# Altium PCB PCB_draft_00.PcbDoc (part 2 of 2)
Units mil, origin at the board's own origin, x right, y up, seen from the top; angles counter-clockwise.
Board outline 3461 x 3199 mil, 2 copper layers (Top Layer, Bottom Layer); 133 components, 93 nets, 389 pads, 200 vias.
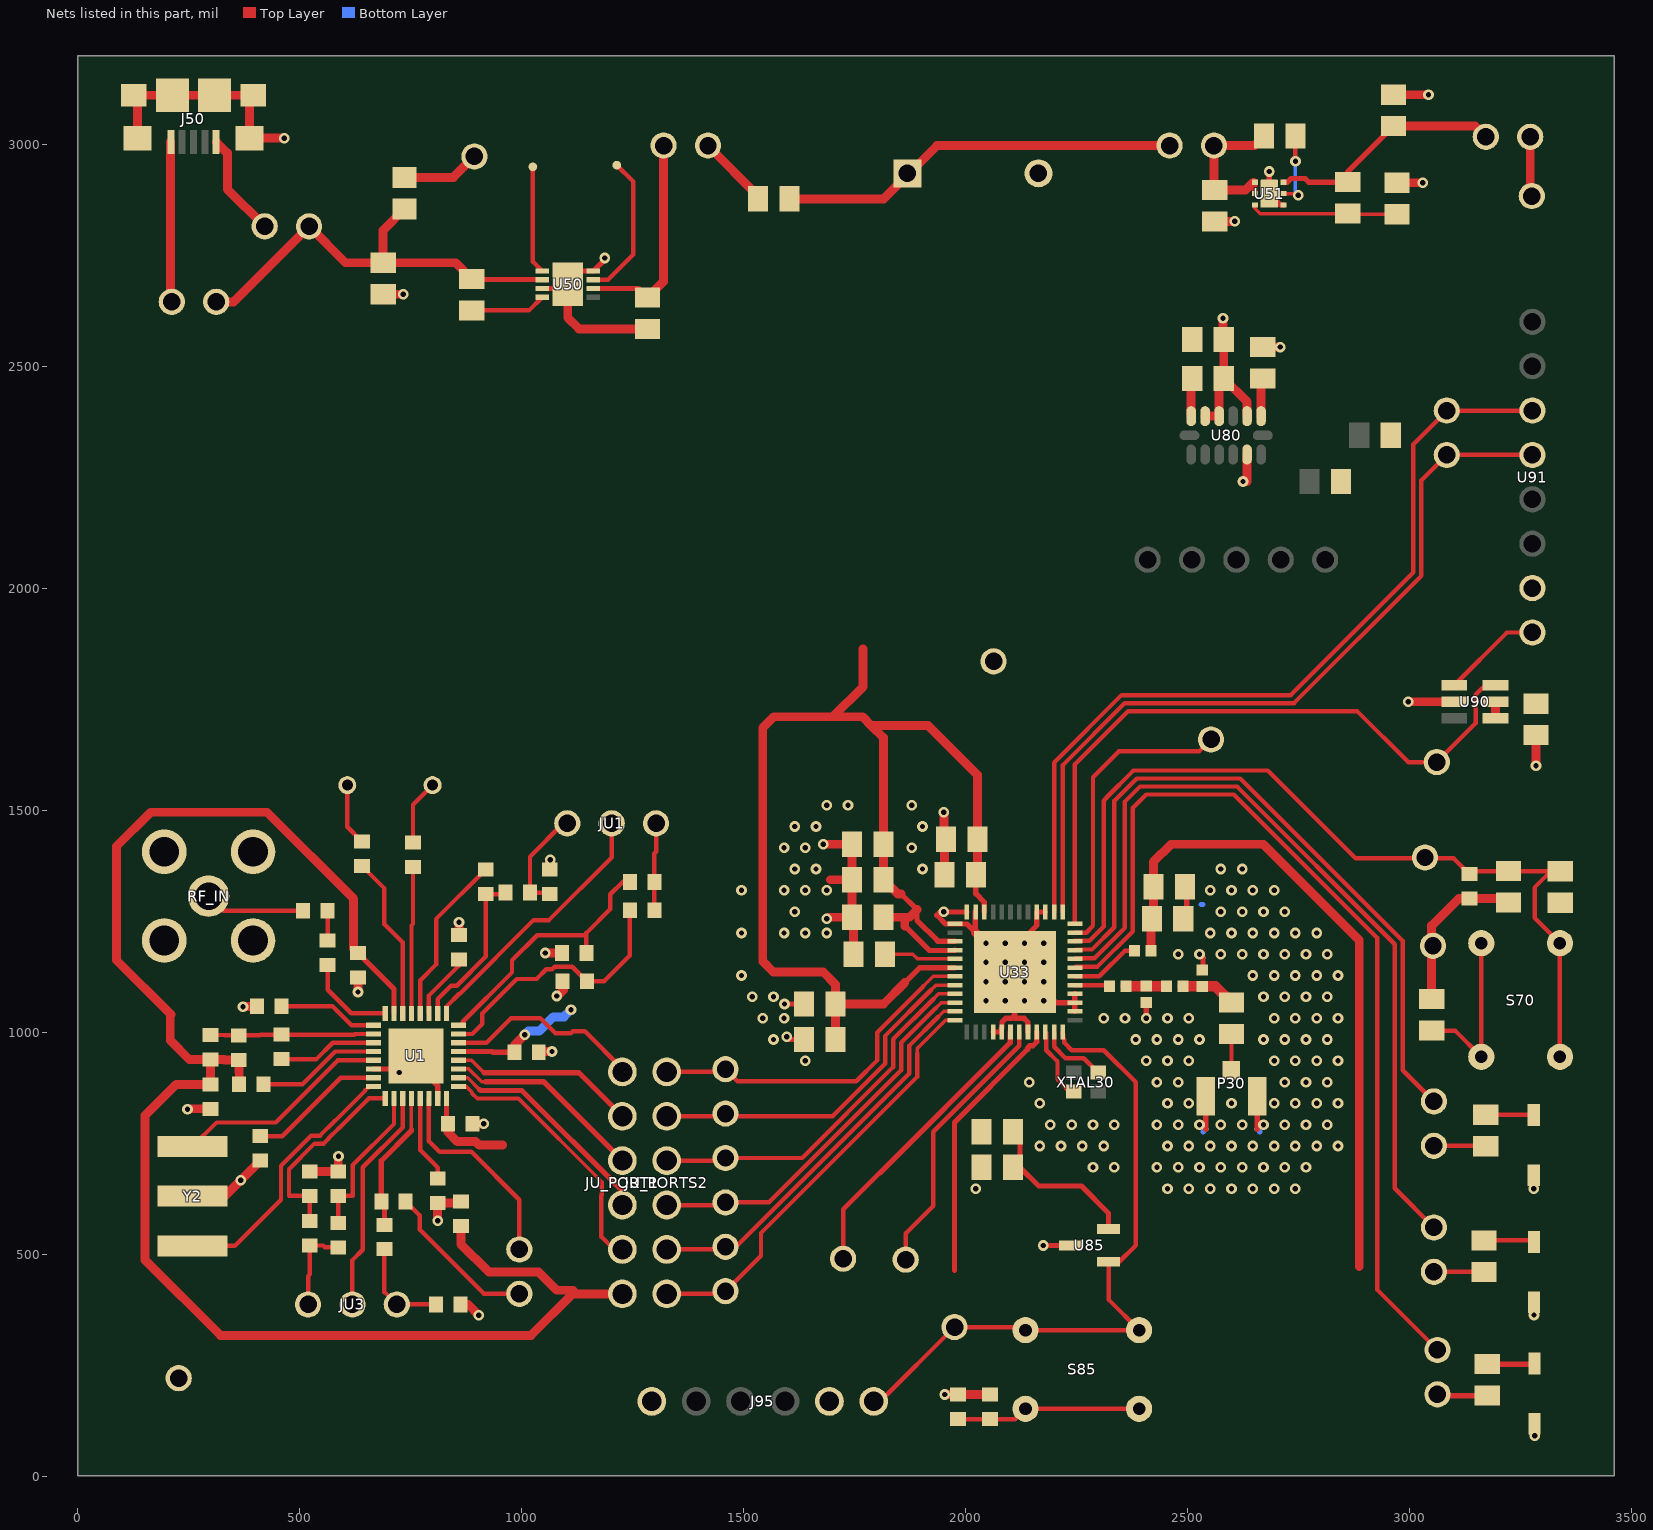
[diagram p2: the nets of this part, all layers, seen from the top]

## Via types
v1: diameter 24, hole 12, Top Layer to Bottom Layer, 200 vias

## Nets (pads, with @x,y where several pads share a name; then routed paths per layer and width w, separated by ;. In a path a pad name is that pad's centre, name@x,y a point inside that pad or via, vN(x,y) a via of type N, cw(c..) or ccw(c..) an arc to the next point about the centre after c; other vN are vias at no path point) (continued)
GND: C1.1 C2.1 C3.2 C5.1 C6.2 C10.1 C12.1 C19.1 C20.1 C21.1 C23.1 C26.1 C27.1 C29.1 C31.1 C32.1 C33.2 C34.2 C35.1 C36.1 C37.1 C38.1 C39.1 C40.1 C41.1 C42.1 C43.1 C44.1 C50.2 C51.1 C52.1 C53.1 C54.1 C70.1 C80.2 C81.1 C82.1 C90.2 D70.2 D71.2 D72.2 J50.5 J50.S1 J50.S2 J50.S3 J50.S4 J50.S5 J50.S6 J95.1 L3.1 P30.2 P30.3 R52.1 R70.1 R85.1 RF_IN.1 RF_IN.2 RF_IN.3 RF_IN.4 S50.2 TP10.1 TP14.1 TP20.1 TP50.1 U1.14 U1.23 U1.33 U33.0 U33.4 U33.5 U33.8 U33.14 U33.15 U33.16 U33.27 U33.28 U33.35 U33.36 U33.37 U50.3 U50.8 U50.9 U51.4 U51.7 U80.2 U80.4 U80.5 U80.12 U85.3 U90.2 U91.7 V50.2 Y2.2 Z70.2 Z85.2 | length 5982.5
  Top Layer w12: U1.14@665.48,917.61 U1.33@731.82,917.61 ; U1.33@761.35,929.09 810.56,879.87 U1.23@810.56,851.27 ; U50.3@1046.07,2676.16 U50.9@1093.72,2676.16 ; U50.9@1103.57,2686 1133.09,2715.53 U50.8@1161.07,2715.53 1187.09,2741.56 v1(1187.09,2744.74) ; v1(1592,1064) C44.1@1635.57,1064 ; v1(1597,990) 1603,984 C43.1@1635.57,984 ; U33.36@2002.73,1271.24 1942.24,1271.24 1935,1264 1954.73,1244.27 2002.73,1244.27 2021.85,1225.15 U33.35@2021.85,1271.8 ; v1(2046.04,1200.96) U33.0@2111,1136 ; U33.4@2061.79,1000.76 2080.59,1000.76 2080.59,1008.48 2082.04,1009.93 2082.04,1023.49 2090.24,1031.69 2103.8,1031.69 2111,1038.89 ; U33.8@2140.53,1000.76 2139.96,1001.33 2139.96,1023.49 2131.76,1031.69 2112.07,1031.69 2111,1032.77 2111,1038.89 ; v1(2175,520) U85.3@2236,520 ; U33.27@2179.9,1271.24 U33.28@2160.21,1271.24 2160.21,1241.21 2111,1192 U33.0@2111,1136 ; U33.14@2246.24,1047.42 U33.15@2246.24,1067.1 ; U33.16@2246.24,1086.79 U33.15@2246.24,1067.1 ; v1@2407,1040 C31.1@2407,1067.39 ; C38.1@2490.43,1256 2498.43,1256 2498.43,1320 C39.1@2490.43,1328 ; C32.1@2535,1138.31 v1@2535,1168 ; 2540.93,781.93 P30.3@2540.93,856 ; 2657.07,781.93 P30.2@2657.07,856 ; v1(2684.09,2939.74) U51.7@2684.09,2889.74 2709.68,2864.15 U51.4@2716.57,2864.15 ; 2111,1038.89 U33.0@2111,1136 ; U33.0@2111,1136 2135,1136 2166.31,1104.69 2203.9,1067.1 U33.15@2246.24,1067.1
  Top Layer w20: J50.S6@134.38,3014.87 134.38,3102.47 J50.S5@125.52,3111.32 J50.S4@213.12,3111.32 J50.S3@307.61,3111.32 J50.S2@395.21,3111.32 386.35,3102.47 J50.S1@386.35,3014.87 v1(465.22,3014.87) ; J50.5@209.18,3006.01 208.9,3006.01 208.9,2648.67 S50.2@211.57,2646 ; v1(247,827) 247.88,827.88 C10.1@298.56,827.88 ; Y2.2@258.56,631 330.56,631 v1(366.56,667) C12.1@410.56,711 ; v1(372,1058) 402.44,1058 L3.1@403.44,1059 ; C19.1@522.56,687 C20.1@586.56,687 v1@586.56,710.56 ; v1(631,1091) C6.2@631,1123.88 ; C53.1@687.57,2663.13 v1(733.11,2663.13) ; v1(724,909.79) 731.82,917.61 U1.33@761.35,947.13 U1.33@761.35,929.09 ; V50.2@735.76,2926.29 845.99,2926.29 TP50.1@893.24,2973.53 ; v1(810.56,575.44) C21.1@810.56,615.44 859.44,615.44 C23.1@863,619 ; C3.2@858.56,1219 v1(858.56,1248) ; C27.1@862.12,387 879,387 v1(903,363) ; C26.1@888.56,794 v1(914,794) ; C29.1@1038.25,955 1040.25,957 v1(1068,957) ; v1(1053,1179) C2.1@1090.56,1179 ; C5.1@1063,1366.56 1064.44,1368 1064,1368.44 v1(1064,1389) ; v1(1079,1082) 1081,1082 1094,1095 1091.44,1097.56 C1.1@1091.44,1115 ; U50.9@1093.72,2676.16 U50.9@1103.57,2686 1103.57,2610.27 1129.09,2584.74 C51.1@1283.09,2584.74 ; v1(1679,1424) C35.1@1744.13,1424 C36.1@1744.13,1344 ; v1(1687,1256) 1690.43,1259.43 C37.1@1744.13,1259.43 ; 1695,1344 C36.1@1744.13,1344 ; C42.1@1747.57,1176 1747.57,1256 C37.1@1744.13,1259.43 ; v1(1951,1496) 1951,1440 C34.2@1955.57,1435.43 ; C33.2@1952.13,1355.43 C34.2@1952.13,1432 ; v1(1953,184) R85.1@1983,184 Z85.2@2055,184 ; U33.0@2021.85,1225.15 v1(2046.04,1200.96) ; U80.5@2539.67,2388.34 U80.4@2571.17,2388.34 C80.2@2571.17,2462.81 ; C54.1@2561.09,2827.31 v1(2606.64,2827.31) ; v1(2580,2609) 2580,2553.46 C81.1@2580.59,2552.87 ; C81.1@2581.49,2561.13 C80.2@2581.5,2473.13 2634.16,2420.47 U80.2@2634.16,2388.34 ; v1(2624.83,2241.17) 2634.16,2241.17 U80.12@2634.16,2301.93 ; C82.1@2669.5,2544 v1(2709,2544) ; C52.1@2964.09,3112.61 v1(3042.96,3112.61) ; R52.1@2971.84,2914.21 v1(3029.57,2914.21) ; v1(2997,1745) U90.2@3101,1745 ; R70.1@3050,1075 3050,1240.45 3111,1301.45 Z70.2@3135,1301.45 3214.12,1301.45 C70.1@3223,1292.57 ; v1(3280,648) D72.2@3280,678.09 ; v1(3280.57,363.43) D71.2@3280.57,392.09 ; v1(3282,91) D70.2@3282,118.09 ; v1(3285,1601) C90.2@3285,1669.57 ; C37.1@1744.13,1259.43 C36.1@1744.13,1344
  Bottom Layer w12: 2530.43,1288 2535,1288 ; 2535,776 2540.93,781.93 ; 2657.07,781.93 2663,776
  Bottom Layer w20: v1@724,903 v1(724,909.79) ; v1(914,794) v1@915,795
  other v1: 2023,648 2455,648 2503,648 2551,648 2599,648 2647,648 2695,648 2743,648 2287,696 2335,696 2431,696 2479,696 2527,696 2575,696 2623,696 2671,696 2719,696 2767,696 587,721 2167,744 2215,744 2263,744 2311,744 2455,744 2503,744 2551,744 2599,744 2647,744 2695,744 2743,744 2791,744 2839,744 2191,792 2239,792 2287,792 2335,792 2431,792 2479,792 2527,792 2575,792 2623,792 2671,792 2719,792 2767,792 2815,792 2167,840 2455,840 2503,840 2599,840 2695,840 2743,840 2791,840 2839,840 2143,888 2431,888 2479,888 2719,888 2767,888 2815,888 1639,936 2407,936 2455,936 2503,936 2695,936 2743,936 2791,936 2839,936 1567,984 2383,984 2431,984 2479,984 2527,984 2671,984 2719,984 2767,984 2815,984 1543,1032 1591,1032 2311,1032 2359,1032 2407,1032 2455,1032 2503,1032 2695,1032 2743,1032 2791,1032 2839,1032 2046.04,1071.04 2089.35,1071.04 2132.65,1071.04 2175.96,1071.04 1519,1080 1567,1080 2671,1080 2719,1080 2767,1080 2815,1080 2046.04,1114.35 2089.35,1114.35 2132.65,1114.35 2175.96,1114.35 1495,1128 2647,1128 2695,1128 2743,1128 2791,1128 2839,1128 2046.04,1157.65 2089.35,1157.65 2132.65,1157.65 2175.96,1157.65 2479,1176 2527,1176 2575,1176 2623,1176 2671,1176 2719,1176 2767,1176 2815,1176 2089.35,1200.96 2132.65,1200.96 2175.96,1200.96 1495,1224 1591,1224 1639,1224 1687,1224 2551,1224 2599,1224 2647,1224 2695,1224 2743,1224 2791,1224 1615,1272 1951,1272 2575,1272 2623,1272 2671,1272 2719,1272 1495,1320 1591,1320 1639,1320 1687,1320 2551,1320 2599,1320 2647,1320 2695,1320 1615,1368 1663,1368 1903,1368 2575,1368 2623,1368 1591,1416 1639,1416 1879,1416 1615,1464 1663,1464 1903,1464 1687,1512 1735,1512 1879,1512
GPS_PWR_ON: TP13.1 U33.24 U90.6 | length 1483.3
  Top Layer w10: U33.24@2246.24,1244.27 2246.24,1604 2366.24,1724 2882,1724 2997,1609 TP13.1@3061.59,1609 3149,1696.41 3149,1761 U90.6@3165,1777
GPS_RX: TP12.1 U33.26 U91.3 | length 1911.8
  Top Layer w10: U33.26@2199.58,1271.24 2199.58,1607 2201.27,1608.68 2201.27,1609.94 2351.32,1760 2732.54,1760 3009,2036.46 3009,2325 3085,2401 U91.3@3277,2401
GPS_TX: TP11.1 U33.25 U91.4 | length 1804.3
  Top Layer w10: U33.25@2219.27,1271.24 2219.27,1602.49 2358.78,1742 2740,1742 3027,2029 3027,2244 TP11.1@3084,2301 U91.4@3277,2301
NetC1_2: C1.2 R1.1 U1.31 | length 602.6
  Top Layer w10: U1.31@857.21,996.35 888.35,996.35 911,1019 911,1042.63 988.69,1120.33 1033.33,1120.33 1055,1142 1068.33,1142 1074.33,1148 1113.56,1148 C1.2@1146.56,1115 1185.44,1115 1243.44,1173 R1.1@1243.44,1275
NetC2_2: C2.2 R2.1 U1.32 | length 605.1
  Top Layer w10: U1.32@857.21,1016.03 866.91,1016.03 866.91,1024 978,1135.09 978,1162.33 1034.67,1219 1140.56,1219 1145.68,1224.12 ; C2.2@1145.68,1179 1145.68,1224.12 ; R2.1@1243.44,1339 1227.56,1339 1199.56,1311 1199.56,1278 1145.68,1224.12
NetC3_1: C3.1 U1.3 | length 149
  Top Layer w10: U1.3@790.88,1043 790.88,1083 791,1083 858.56,1150.56 C3.1@858.56,1163.88
NetC4_1: C4.1 R3.1 U1.2 | length 366.6
  Top Layer w10: U1.2@810.56,1043 810.56,1075 840.78,1105.22 853.22,1105.22 919,1171 C4.1@919,1311.44 959.89,1311.44 R3.1@963.44,1315
NetC4_2: C4.2 U1.4 | length 385.2
  Top Layer w10: U1.4@771.19,1043 771.19,1117.13 807,1152.94 807,1255.33 918.24,1366.56 C4.2@919,1366.56
NetC5_2: C5.2 JU1.3 R3.2 | length 241.9
  Top Layer w10: C5.2@1063,1311.44 1059.44,1315 R3.2@1018.56,1315 1018.56,1395.89 1093.67,1471 JU1.3@1102.56,1471
NetC7_1: C7.1 L1.1 | length 67.1
  Top Layer w10: L1.1@562.56,1207 C7.1@562.56,1274.12
NetC7_2: C7.2 RF_IN.5 | length 226.5
  Top Layer w10: RF_IN.5@294.56,1307 327.44,1274.12 C7.2@507.44,1274.12
NetC8_2: C8.2 U1.12 | length 277.6
  Top Layer w10: C8.2@418.56,883 506.02,883 579.99,956.98 U1.12@665.48,956.98
NetC9_2: C9.2 C11.1 L2.1 U1.10 | length 368.6
  Top Layer w10: L2.1@298.56,994.12 329.56,994.12 330.44,993.24 C9.2@362.56,993.24 409.56,993.24 411.32,995 C11.1@458.56,995 622.21,995 623.56,996.35 U1.10@665.48,996.35
NetC11_2: C11.2 U1.11 | length 222.2
  Top Layer w10: C11.2@458.56,939.88 537.44,939.88 574.22,976.66 U1.11@665.48,976.66
NetC12_2: C12.2 U1.15 | length 309.5
  Top Layer w10: C12.2@410.56,766.12 460.12,766.12 591.92,897.92 U1.15@665.48,897.92
NetC14_1: C14.1 U1.5 | length 330.9
  Top Layer w10: U1.5@751.51,1043 751.51,1240.83 755,1244.32 C14.1@755,1372.44
NetC14_2: C14.2 Y1.2 | length 147.7
  Top Layer w10: C14.2@755,1427.56 755,1512.94 Y1.2@799.06,1557
NetC15_1: C15.1 U1.6 | length 369.9
  Top Layer w10: C15.1@640,1374.88 690.56,1324.32 690.56,1243.88 731.82,1202.62 U1.6@731.82,1043
NetC15_2: C15.2 Y1.1 | length 140.7
  Top Layer w10: Y1.1@606.94,1557 606.94,1463.06 C15.2@640,1430
NetC19_2: C19.2 R6.2 U1.17 | length 447.1
  Top Layer w10: R6.2@522.56,575 C19.2@522.56,631.88 475.56,631.88 475.56,691.85 533.25,749.54 553.54,749.54 563.56,759.56 563.56,760.09 586,782.53 586.53,782.53 655.27,851.27 U1.17@692.45,851.27
NetC20_2: C20.2 R7.2 U1.18 | length 351.6
  Top Layer w10: R7.2@586.56,571 C20.2@586.56,631.88 619.52,631.88 619.52,701.19 712.14,793.81 U1.18@712.14,851.27
NetC21_2: C21.2 U1.21 | length 197
  Top Layer w10: U1.21@771.19,851.27 771.19,734.81 810.56,695.44 C21.2@810.56,670.56
NetC22_1: C22.1 R8.2 U1.20 | length 315.9
  Top Layer w8: 751.51,780.51 U1.20@751.51,851.27
  Top Layer w12: R8.2@690.56,566.56 690.56,611.88 C22.1@683.44,619 683.44,710.57 751.51,778.64 751.51,780.51
NetC22_2: C22.2 JU6.2 | length 360.8
  Top Layer w10: C22.2@738.56,619 770,587.56 770,555.67 914.67,411 JU6.2@994.56,411
NetC27_2: C27.2 JU3.1 R8.1 | length 224.5
  Top Layer w10: R8.1@690.56,511.44 690.56,415 JU3.1@718.56,387 C27.2@807,387
NetC31_2: C31.2 L31.2 L32.1 | length 91.4
  Top Layer w24: L31.2@2361.31,1104 C31.2@2407,1104 L32.1@2452.69,1104
NetC32_2: C32.2 L32.2 R31.2 | length 124.8
  Top Layer w24: L32.2@2489.31,1104 2562.44,1104 R31.2@2599,1067.43
NetC42_2: C42.2 U33.41 | length 161.7
  Top Layer w8: C42.2@1818.43,1176 1880.98,1176 1891.45,1165.53 U33.41@1975.76,1165.53
NetC70_2: C70.2 R71.1 S70.2 S70.4 TP3.1 U33.22 Z70.1 | length 1956.8
  Top Layer w10: U33.22@2246.24,1204.9 2246.24,1206.46 2278.92,1206.46 2311,1238.54 2311,1522 2317,1528 2317,1528.91 2378.09,1590 2681,1590 2879,1392 3099.57,1392 Z70.1@3135,1356.57 3141.87,1363.43 C70.2@3223,1363.43 3319,1363.43 3281.9,1326.34 3281.9,1258 S70.2@3339,1200.9 S70.4@3339,945
"NetCeramFilter 10.7MHz 180kHz_1": U1.13 Y2.1 | length 487.3
  Top Layer w10: Y2.1@258.56,743.2 312.36,797 445.47,797 585.76,937.29 U1.13@665.48,937.29
"NetCeramFilter 10.7MHz 180kHz_3": U1.16 Y2.3 | length 600.5
  Top Layer w8: 647.81,869.27 656.78,878.24 U1.16@665.48,878.24
  Top Layer w10: Y2.3@258.56,518.8 353.36,518.8 457.56,623 457.56,699.31 525.8,767.54 545.56,767.54 578.54,800.53 579.07,800.53 647.81,869.27
NetD70_1: D70.1 R72.1 | length 107.6
  Top Layer w12: R72.1@3175,252.43 3280.52,252.43 D70.1@3282,253.91
NetD71_1: D71.1 R73.1 | length 114
  Top Layer w10: R73.1@3168,531.43 3277.05,531.43 D71.1@3280.57,527.91
NetD72_1: D72.1 R74.1 | length 108.2
  Top Layer w10: R74.1@3172,814.43 3279.48,814.43 D72.1@3280,813.91
NetG95_15: J95.6 S85.1 S85.3 TP21.1 U33.12 U85.1 | length 1519.5
  Top Layer w10: J95.6@1793,168.72 1807.72,168.72 TP21.1@1975,336 2128.16,336 S85.3@2135,329.16 S85.1@2390.91,329.16 2322,398.07 U85.1@2322,483 2346,483 2383,520 2383,888 2311,960 2239,960 2222.65,976.35 2222.65,983.46 2220.54,985.58 2220.54,995.92 2219.27,997.19 U33.12@2219.27,1000.76
NetJU1_1: JU1.1 R1.2 R2.2 | length 197.7
  Top Layer w10: R1.2@1298.56,1275 R2.2@1298.56,1339 1298.56,1403 1302.56,1407 JU1.1@1302.56,1471
NetJU1_2: JU1.2 U1.1 | length 603.5
  Top Layer w10: U1.1@830.25,1043 830.25,1058.25 859.22,1087.22 860.68,1087.22 1026.46,1253 1061.33,1253 1202.56,1394.23 JU1.2@1202.56,1471
NetJU3_2: JU3.2 U1.19 | length 511.2
  Top Layer w10: JU3.2@618.56,387 618.56,487 642,510.44 642,696 731.82,785.82 U1.19@731.82,851.27
NetJU3_3: JU3.3 R6.1 R7.1 | length 200.2
  Top Layer w10: JU3.3@518.56,387 518.56,451 522.56,455 R6.1@522.56,519.88 552.56,519.88 556.56,515.88 R7.1@586.56,515.88
NetJU6_1: JU6.1 U1.22 | length 466.7
  Top Layer w10: U1.22@790.88,851.27 790.88,755.12 792,754 792,753.67 813.67,732 814,732 815,731 886.56,731 994.56,623 JU6.1@994.56,511
NetJU70_1: JU70.1 U33.19 | length 2123.7
  Top Layer w10: U33.19@2246.24,1145.84 2247.8,1147.41 2296.23,1147.41 2377,1228.18 2377,1506 2407,1536 2604.09,1536 2927,1213.09 2927,420.57 JU70.1@3063,284.57
NetJU70_2: JU70.2 R72.2 | length 114
  Top Layer w10: R72.2@3183.57,184.57 R72.2@3184.13,184
  Top Layer w12: JU70.2@3063,184.57 3066,181.57 R72.2@3175,181.57
NetJU71_1: JU71.1 U33.20 | length 1869.9
  Top Layer w10: U33.20@2246.24,1165.53 2247.8,1167.09 2290.46,1167.09 2359,1235.63 2359,1520 2393,1554 2611.54,1554 2967,1198.54 2967,648.57 JU71.1@3055,560.57
NetJU71_2: JU71.2 R73.2 | length 113
  Top Layer w10: JU71.2@3055,460.57 R73.2@3168,460.57
NetJU72_1: JU72.1 U33.21 | length 1607.6
  Top Layer w10: U33.21@2246.24,1185.21 2247.8,1186.78 2284.69,1186.78 2335,1237.09 2335,1521.46 2385.54,1572 2619,1572 2985,1206 2985,914.57 JU72.1@3055,844.57
NetJU72_2: JU72.2 R74.2 | length 118.2
  Top Layer w10: JU72.2@3055,744.57 3171,744.57 R74.2@3172,743.57 ; R74.2@3179,744.57 R74.2@3179.57,744
NetJU_PORT1_1: JU_PORT1.1 U1.30 | length 450.7
  Top Layer w10: U1.30@857.21,976.66 920.34,976.66 975.67,1032 1042,1032 1076,998 1110.33,998 1115.33,1003 1141.61,1003 1226.56,918.05 JU_PORT1.1@1226.56,911
NetJU_PORT1_2: JU_PORT1.2 U1.28 | length 421.7
  Top Layer w8: U1.28@857.21,937.29 886.68,937.29 914.98,909
  Top Layer w12: 914.98,909 1128.56,909 JU_PORT1.2@1226.56,811
NetJU_PORT1_3: JU_PORT1.3 U1.27 | length 454.9
  Top Layer w8: U1.27@857.21,917.61 880.91,917.61 909.52,889 918.98,889
  Top Layer w12: 918.98,889 1048.56,889 JU_PORT1.3@1226.56,711
NetJU_PORT1_4: JU_PORT1.4 U1.26 | length 506.6
  Top Layer w8: U1.26@857.21,897.92 877.97,897.92 904.89,871
  Top Layer w12: 904.89,871 906.89,869 1000,869 1226.56,642.44 JU_PORT1.4@1226.56,611
NetJU_PORT1_5: JU_PORT1.5 U1.25 | length 596.5
  Top Layer w8: U1.25@857.21,878.24 875.03,878.24 886.89,866.37 886.89,863.54 899.44,851 992.54,851 1180.08,663.46
  Top Layer w10: 1179.37,662.76 1180.08,662.05 1180.08,632.67 1179.08,631.67 1179.08,539.92 1208,511 JU_PORT1.5@1226.56,511
NetL1_2: L1.2 U1.8 | length 207.6
  Top Layer w10: L1.2@562.56,1151.88 562.56,1096.28 615.84,1043 U1.8@692.45,1043
NetL3_2: L3.2 U1.9 | length 224.7
  Top Layer w10: L3.2@458.56,1059 573.56,1059 616.53,1016.03 U1.9@665.48,1016.03
NetL30_2: L30.2 U33.18 | length 158.4
  Top Layer w10: U33.18@2246.24,1126.16 2301.16,1126.16 2359,1184 L30.2@2380.69,1184
NetL31_1: L31.1 U33.17 | length 79.5
  Top Layer w10: U33.17@2246.24,1106.47 2322.22,1106.47 L31.1@2324.69,1104
NetL50_1: L50.1 U50.1 | length 243.2
  Top Layer w10: L50.1@1025.08,2950 1025.08,2736.52 U50.1@1046.07,2715.53
NetL50_2: L50.2 U50.7 | length 330.3
  Top Layer w10: U50.7@1161.07,2695.84 1194.41,2695.84 1251.09,2752.53 1251.09,2916.9 L50.2@1214.05,2953.94
NetL51_2: L51.2 U51.5 | length 170.7
  Top Layer w8: U51.5@2716.57,2889.74 2745.09,2889.74 v1(2749.09,2885.74)
  Top Layer w10: v1(2743.09,2962.74) L51.2@2743.09,3019.74
  Bottom Layer w8: v1(2743.09,2962.74) 2743.09,2891.74 v1(2749.09,2885.74)
NetP30_1: P30.1 R31.1 | length 81.5
  Top Layer w10: P30.1@2599,915.05 R31.1@2599,996.57
NetR51_1: R51.1 R52.2 U51.3 | length 333.2
  Top Layer w8: U51.3@2651.61,2864.15 2651.61,2856.7 2663.54,2844.78 R51.1@2860.84,2844.78 2862.27,2843.35 R52.2@2971.84,2843.35
NetR53_1: R53.1 U50.4 | length 170.9
  Top Layer w10: R53.1@887.57,2626.57 1016.16,2626.57 U50.4@1046.07,2656.47
NetR70_2: R70.2 S70.1 S70.3 | length 392.2
  Top Layer w10: R70.2@3050,1004.13 3102.7,1004.13 S70.3@3161.83,945 S70.1@3161.83,1200.9
NetR85_2: R85.2 S85.2 S85.4 Z85.1 | length 417.5
  Top Layer w10: R85.2@1983,128.88 2018,128.88 2111.88,128.88 S85.4@2135,152 S85.2@2390.91,152
NetTP0_1: TP0.1 U33.23 | length 683.4
  Top Layer w10: U33.23@2246.24,1224.58 2271.58,1224.58 2287,1240 2287,1575 2345,1633 2526,1633 TP0.1@2553,1660
NetTP1_1: TP1.1 U33.7 | length 618.7
  Top Layer w10: TP1.1@1865,488 1865,547 1927,609 1927,776 2120.84,969.84 U33.7@2120.84,1000.76
NetTP2_1: TP2.1 U33.6 | length 665.8
  Top Layer w10: TP2.1@1724,490 1724,601.68 1805.16,682.84
  Top Layer w12: 1807,683.26 2100.59,976.85 2100.59,1000.2 U33.6@2101.16,1000.76
NetU33_10: U33.10 XTAL30.1 | length 165.7
  Top Layer w10: U33.10@2179.9,1000.76 2181.46,999.2 2181.46,978.45 2181.58,978.33 2181.58,959.96 2207,934.54 2207,894.25 2234.9,866.35 XTAL30.1@2243.44,866.35
NetU33_11: U33.11 XTAL30.3 | length 156.2
  Top Layer w10: U33.11@2199.58,1000.76 2199.58,967.42 2225,942 2266.21,942 XTAL30.3@2298.56,909.65
NetU90_1: U90.1 U91.8 | length 245.6
  Top Layer w10: U90.1@3101,1782.4 3219.6,1901 U91.8@3277,1901 U91.8@3291.5,1886.5
SPI_C\S\: JU_PORTS2.3 TP7.1 U33.46 | length 878.3
  Top Layer w8: 1932.44,1054.81 1944.73,1067.1 U33.46@1975.76,1067.1
  Top Layer w10: JU_PORTS2.3@1326.56,611 1453,611 TP7.1@1459,617 1557.09,617 1854.54,914.45 1854.54,976.91 1932.44,1054.81
  Bottom Layer w10: JU_PORTS2.3@1323,611 JU_PORTS2.3@1326.56,611
SPI_CLK: JU_PORTS2.5 TP8.1 U33.44 | length 813.1
  Top Layer w8: 1922.47,1095.75 1933.19,1106.47 U33.44@1975.76,1106.47
  Top Layer w10: JU_PORTS2.5@1326.56,811 1453,811 TP8.1@1459,817 1465,811 1700.18,811 1818.54,929.37 1818.54,991.82 1922.47,1095.75
SPI_PWR_ON: JU_PORTS2.1 TP9.1 U33.48 | length 972
  Top Layer w8: 1890.54,953.06 1890.54,963.41 1954.86,1027.73 U33.48@1975.76,1027.73
  Top Layer w10: JU_PORTS2.1@1326.56,411 1453,411 TP9.1@1459,417 1539,497 1539,548 1890.54,899.54 1890.54,953.06
SPI_RX: JU_PORTS2.2 TP5.1 U33.47 | length 911.5
  Top Layer w8: 1938.21,1035.13 1950.51,1047.42 U33.47@1975.76,1047.42
  Top Layer w10: JU_PORTS2.2@1326.56,511 1453,511 TP5.1@1459,517 1482.54,517 1872.54,907 1872.54,969.46 1938.21,1035.13
  Bottom Layer w10: JU_PORTS2.2@1323,511 JU_PORTS2.2@1326.56,511
SPI_RX2: JU_PORTS2.6 TP4.1 U33.43 | length 797.3
  Top Layer w8: 1904.87,1103.6 1927.42,1126.16 U33.43@1975.76,1126.16
  Top Layer w10: JU_PORTS2.6@1326.56,911 1453,911 TP4.1@1459,917 1486,890 1753.72,890 1800.54,936.82 1800.54,999.28 1904.87,1103.6
SPI_TX: JU_PORTS2.4 TP6.1 U33.45 | length 845
  Top Layer w8: 1928.24,1076.06 1938.96,1086.79 U33.45@1975.76,1086.79
  Top Layer w10: JU_PORTS2.4@1326.56,711 1453,711 TP6.1@1459,717 1631.63,717 1836.54,921.91 1836.54,984.37 1928.24,1076.06
  Bottom Layer w10: JU_PORTS2.4@1323,711 JU_PORTS2.4@1326.56,711
VCC_3.3: C33.1 C34.1 C35.2 C36.2 C37.2 C38.2 C39.2 C40.2 C41.2 C43.2 C44.2 C80.1 C81.2 C82.2 C90.1 J95.5 L30.1 P52.2 R45.2 R46.2 R71.2 TP51.1 U33.9 U33.34 U33.39 U33.40 U33.42 U80.1 U80.6 U85.2 U90.4 U90.5 | length 5834.9
  Top Layer w12: 1855,1312 1890.54,1276.46 1890.54,1252.46 1937.54,1205.46 1975.2,1205.46 U33.39@1975.76,1204.9 ; 1863,1112 1896.28,1145.28 1975.2,1145.28 U33.42@1975.76,1145.84 ; 1863,1239.88 1918.24,1184.65 1975.2,1184.65 U33.40@1975.76,1185.21 ; 1975,464 1975,797.13 2139.84,961.97 2139.84,964.84 2144.83,969.83 2151.44,969.83 2160.53,978.92 U33.9@2160.53,1001.33 ; C33.1@2026.3,1352.13 C33.1@2023,1355.43 2023,1312.5 2041.85,1293.65 2041.85,1271.49 U33.34@2042.1,1271.24 ; C40.2@2122.43,776 2122.43,696 2164.72,653.72 2260.72,653.72 2322,592.43 U85.2@2322,557
  Top Layer w20: C43.2@1706.43,984 C44.2@1706.43,1064 ; 1769,1864 1769,1779 1701,1711 ; C37.2@1815,1259.43 1863,1259.43 ; 1855,1312 1847,1312 C36.2@1815,1344 C35.2@1815,1424 1815,1664 1787.75,1691.25 ; 1863,1112 1815,1064 C44.2@1706.43,1064 ; 1863,1239.88 1863,1259.43 ; 1890.54,1276.46 1873.52,1259.43 1863,1259.43 ; C33.1@2026.43,1358.87 C34.1@2026.43,1435.43 2026.43,1580.57 1915.75,1691.25 1787.75,1691.25 ; L30.1@2417.31,1184 2417.31,1253.74 C38.2@2419.57,1256 2423,1259.43 C39.2@2423,1328 2423,1384 2463,1424 2671,1424 2887,1208 2887,472 ; U80.6@2508.18,2388.34 C80.1@2508.18,2470.68 ; U80.1@2665.66,2388.34 C82.2@2665.66,2469.29 ; U90.4@3193.99,1707.6 U90.5@3193.99,1745 ; P52.2@3272.09,3017.74 3272.09,2887.85 TP51.1@3275.64,2884.31 ; 1701,1711 1768,1711 1787.75,1691.25 ; 1701,1711 1568,1711 1543,1686 1543,1160 1567,1136 1679,1136 1706.43,1108.57 C44.2@1706.43,1064
VCC_50: C54.2 L51.1 P50.2 U51.1 U51.2 | length 342.1
  Top Layer w12: U51.2@2651.61,2889.74 U51.1@2651.61,2915.33
  Top Layer w20: U51.1@2648.41,2915.33 2631.25,2898.18 C54.2@2561.09,2898.18 2559.57,2899.7 P50.2@2559.57,2998 2650.49,2998 L51.1@2672.23,3019.74
VCC_51_1: C51.2 P51.1 U50.6 | length 488
  Top Layer w12: U50.6@1161.07,2676.16 1262.54,2676.16 C51.2@1283.09,2655.61
  Top Layer w20: C51.2@1283.09,2655.61 1319.57,2692.08 P51.1@1319.57,2998
VCC_51_2: P51.2 R50.1 | length 166.6
  Top Layer w20: P51.2@1419.57,2998 1532.13,2885.43 R50.1@1532.13,2878
VCC_52: C52.2 P52.1 R51.2 U51.6 | length 538.2
  Top Layer w12: U51.6@2716.57,2915.33 2724.94,2915.33 2733.35,2923.74 2764.83,2923.74 2773.24,2915.33 2860.52,2915.33 R51.2@2860.84,2915.65 2860.84,2938.48 C52.2@2964.09,3041.74
  Top Layer w20: C52.2@2964.09,3041.74 3148.09,3041.74 P52.1@3172.09,3017.74
VCC_CAP: C50.1 P50.1 R50.2 | length 906.3
  Top Layer w20: R50.2@1603,2878 1815.57,2878 1935.57,2998 P50.1@2459.57,2998
VCC_RF: C6.1 C8.1 C9.1 C10.2 C23.2 C26.2 C29.2 JU_PORT1.6 L2.2 U1.7 U1.24 U1.29 | length 4264.4
  Top Layer w12: C6.1@631,1179 712.14,1097.86 U1.7@712.14,1043 ; C26.2@830.25,797.2 U1.24@830.25,851.27 ; U1.29@857.21,956.98 933.02,956.98 935,955 C29.2@983.13,955
  Top Layer w20: C8.1@363.44,883 363.44,910 362.56,910.88 C9.1@362.56,938.12 330.44,938.12 329.56,939 L2.2@298.56,939 ; C6.1@631,1179 621.25,1188.75 621.25,1300.75 426,1496 164,1496 87,1419 87,1163 210,1040 208,1038 208,982 251,939 L2.2@298.56,939 ; C26.2@830.25,797.2 C26.2@833.44,794 833.44,775.56 855,754 896.09,754 904.09,746 957,746 ; C23.2@863,563.88 863,523 925.47,460.53 1037.47,460.53 1079,419 1116,419 1116,412.44 1114.56,411 ; C29.2@983.13,955 983.13,971.13 v1(1007,995) ; JU_PORT1.6@1226.56,411 1114.56,411 ; L2.2@298.56,939 C10.2@298.56,883 221.56,883 151,812.44 151,487.56 321.56,317 1020.56,317 1114.56,411
  Bottom Layer w20: v1(1007,995) 1015,1003 1039,1003 1071,1035 1095,1035 v1(1111,1051)
VCC_SOLAR: C53.2 P53.1 R53.2 S50.1 U50.2 V50.1 | length 996
  Top Layer w12: R53.2@887.57,2697.43 888.84,2696.16 U50.2@1046.07,2696.16
  Top Layer w20: S50.1@311.57,2646 350.74,2646 P53.1@520.79,2816.05 602.84,2734 C53.2@687.57,2734 ; V50.1@735.76,2855.42 687.57,2807.23 C53.2@687.57,2734 ; R53.2@887.57,2697.43 851,2734 C53.2@687.57,2734
VCC_USB: J50.1 P53.2 | length 235.4
  Top Layer w20: J50.1@311.54,3006.01 311.83,3006.01 336.85,2980.98 336.85,2899.99 P53.2@420.79,2816.05
pads on no net: J50.2 J50.3 J50.4 U33.13 U33.38 U50.5 U80.3 U80.10 U80.11 U90.3 U91.1 U91.2 U91.5 U91.6 XTAL30.2 XTAL30.4

## Polygon pours and split planes (outlines as drawn)
VCC_RF on Top Layer "top_layer_vcc_rf" (solid, remove dead copper, pour order 6): 1277.13,265 216.07,265 77,404.07 77,1623.92 254.48,1801.4 1238.73,1801.4 1412,1628.13 1412,399.87
GND on Top Layer "MCU RF Shielding" (solid, remove dead copper, pour order 8): 1543,1544 2536,1544 2871,1272 2871,744 2751,624 1892,624 1415.24,1100.76
VCC_3.3 on Top Layer "VCC_3.3_L01_P012" (solid, remove dead copper, pour order 12): 2560.5,2712.5 3008.5,2712.5 3198,2902 3198,3042.45 3249.87,3096 3317,3096 3433,2980 3433,95 3358,20 270,20 28,262 28,1743 196,1911 1759,1911
GND on Bottom Layer "bottom_layer_gnd" (solid, remove dead copper, pour order 0): 27,3085 100,3186 3315,3186 3433,3044 3433,72 3379,18 172,18 27,163

## Other copper
Top Layer:
  pour cut-out: 114,1459 195.5,1501 406,1623 475,1692 937.33,1692 988.45,1532.8 885,1369 677,1369 492,1184 466.87,1126.87 263,1089.5 195.5,1110 90.5,1194.5

## Silkscreen, mask and mechanical layers (free items; w line width, h text height)
Top Overlay:
  lines w10: 1896,2772 ccw(c2032,2786) 2168.44,2777.29
  text "C" at 64.34,2409.73 h193.2
  text "A" at 150.21,2409.73 h155.58
  text "R" at 229.52,2409.73 h155.58
  text "L" at 332.46,2409.73 h193.2
  text "O" at 400.8,2409.73 h155.58
  text "C" at 490.7,2409.73 h155.58
  text "A" at 561.2,2409.73 h155.58
  text "T" at 640.52,2409.73 h155.58
  text "I" at 705.73,2409.73 h155.58
  text "O" at 740.98,2409.73 h155.58
  text "N" at 830.88,2409.73 h155.58
  text "S" at 944.06,2409.73 h193.2
  text "Y" at 1019.41,2409.73 h155.58
  text "S" at 1088.15,2409.73 h155.58
  text "T" at 1149.84,2409.73 h155.58
  text "E" at 1215.06,2409.73 h155.58
  text "M" at 1280.28,2409.73 h155.58
  text "L" at 64.34,2237 h140.2
  text "o" at 113.69,2237 h140.2
  text "w" at 177.14,2237 h140.2
  text "P" at 291.71,2237 h140.2
  text "o" at 355.17,2237 h140.2
  text "w" at 418.62,2237 h140.2
  text "e" at 504.99,2237 h140.2
  text "r" at 564.91,2237 h140.2
  text "E" at 633.65,2237 h140.2
  text "m" at 690.06,2237 h140.2
  text "b" at 787,2237 h140.2
  text "e" at 848.69,2237 h140.2
  text "d" at 908.62,2237 h140.2
  text "d" at 972.07,2237 h140.2
  text "e" at 1033.76,2237 h140.2
  text "d" at 1093.69,2237 h140.2
  text "D" at 1183.58,2237 h140.2
  text "e" at 1257.61,2237 h140.2
  text "s" at 1315.78,2237 h140.2
  text "i" at 1363.37,2237 h140.2
  text "g" at 1391.57,2237 h140.2
  text "n" at 1447.97,2237 h140.2
  text "T" at 1537.86,2237 h140.2
  text "e" at 1596.03,2237 h140.2
  text "c" at 1655.96,2237 h140.2
  text "h" at 1703.55,2237 h140.2
  text "n" at 1767,2237 h140.2
  text "i" at 1830.45,2237 h140.2
  text "q" at 1858.65,2237 h140.2
  text "u" at 1922.11,2237 h140.2
  text "e" at 1985.56,2237 h140.2
  text "s" at 2045.49,2237 h140.2
  text "C" at 64.34,2083.65 h140.2
  text "U" at 126.03,2083.65 h140.2
  text "B" at 230.02,2083.65 h140.2
  text "o" at 297,2083.65 h140.2
  text "u" at 360.45,2083.65 h140.2
  text "l" at 423.91,2083.65 h140.2
  text "d" at 452.11,2083.65 h140.2
  text "e" at 515.56,2083.65 h140.2
  text "r" at 573.73,2083.65 h140.2
  text "F" at 642.47,2083.65 h140.2
  text "a" at 697.11,2083.65 h140.2
  text "l" at 755.27,2083.65 h140.2
  text "l" at 783.47,2083.65 h140.2
  text "2" at 838.12,2083.65 h140.2
  text "0" at 898.04,2083.65 h140.2
  text "1" at 957.97,2083.65 h140.2
  text "8" at 1017.9,2083.65 h140.2
  text "M" at 72.28,1964 h73.59
  text "i" at 127,1964 h73.59
  text "c" at 141.92,1964 h73.59
  text "h" at 168.04,1964 h73.59
  text "e" at 201.62,1964 h73.59
  text "a" at 232.71,1964 h73.59
  text "l" at 263.8,1964 h73.59
  text "B" at 292.41,1964 h73.59
  text "u" at 327.23,1964 h73.59
  text "r" at 360.81,1964 h73.59
  text "i" at 383.2,1964 h73.59
  text "n" at 398.12,1964 h73.59
  text "K" at 501.34,1964 h73.59
  text "a" at 534.92,1964 h73.59
  text "t" at 566.02,1964 h73.59
  text "h" at 587.16,1964 h73.59
  text "y" at 620.74,1964 h73.59
  text "G" at 664.26,1964 h73.59
  text "r" at 704.06,1964 h73.59
  text "i" at 726.45,1964 h73.59
  text "m" at 741.37,1964 h73.59
  text "e" at 792.36,1964 h73.59
  text "s" at 823.45,1964 h73.59
  text "D" at 931.65,1964 h73.59
  text "a" at 971.45,1964 h73.59
  text "n" at 1002.54,1964 h73.59
  text "i" at 1036.12,1964 h73.59
  text "e" at 1051.05,1964 h73.59
  text "l" at 1082.14,1964 h73.59
  text "S" at 1110.74,1964 h73.59
  text "h" at 1140.59,1964 h73.59
  text "e" at 1174.17,1964 h73.59
  text "r" at 1205.26,1964 h73.59
  text "m" at 1227.65,1964 h73.59
  text "a" at 1278.64,1964 h73.59
  text "n" at 1309.73,1964 h73.59
Bottom Overlay:
  drawing of 180 lines, arcs and shapes, not listed
Outline:
  the board outline again, w80

## Text inside footprints (layer, text, board x,y; h text height)
C50: Top Overlay "-" at 2184.17,2898.11 h25 r180; Top Overlay "+" at 1888.89,2898.11 h25 r180
J50: Mechanical 1 "PCB EDGE" at 604.09,3195.74 h25 r180